# EAGLE board tdoa_4011 (EAGLE 8.2.2)
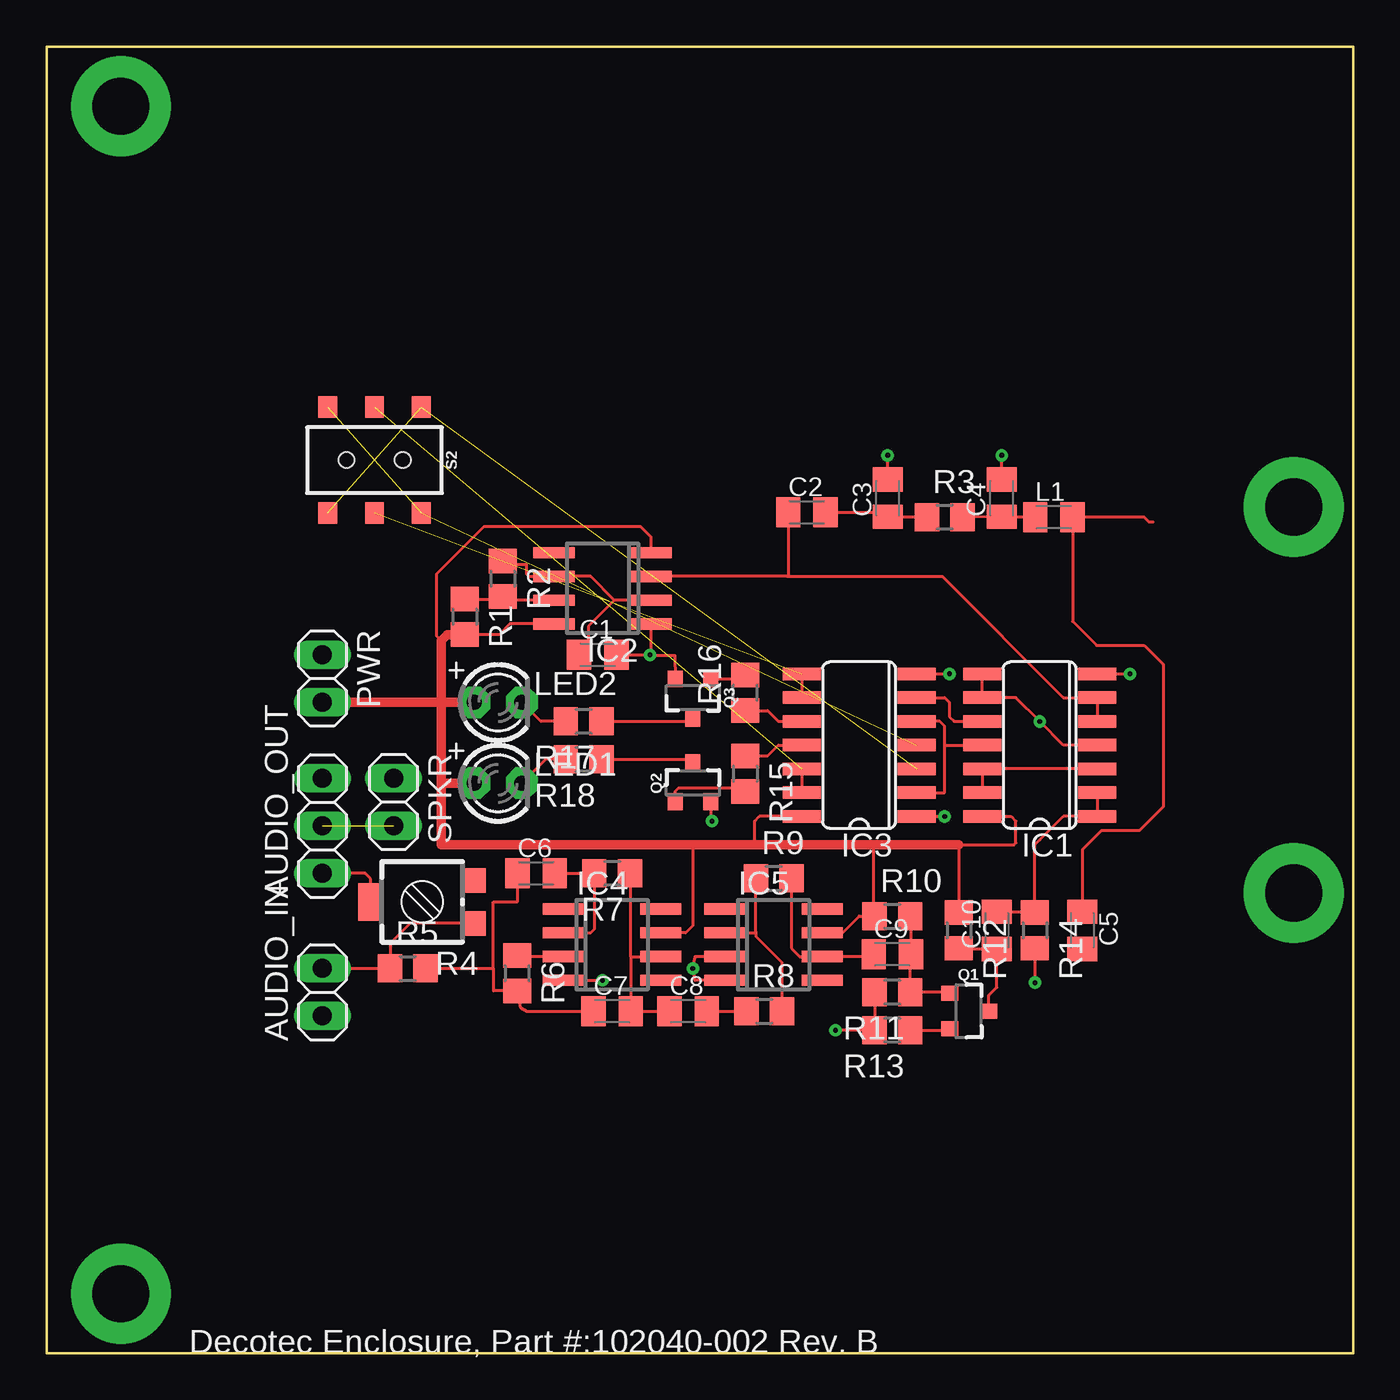
[diagram p0: board, top side]
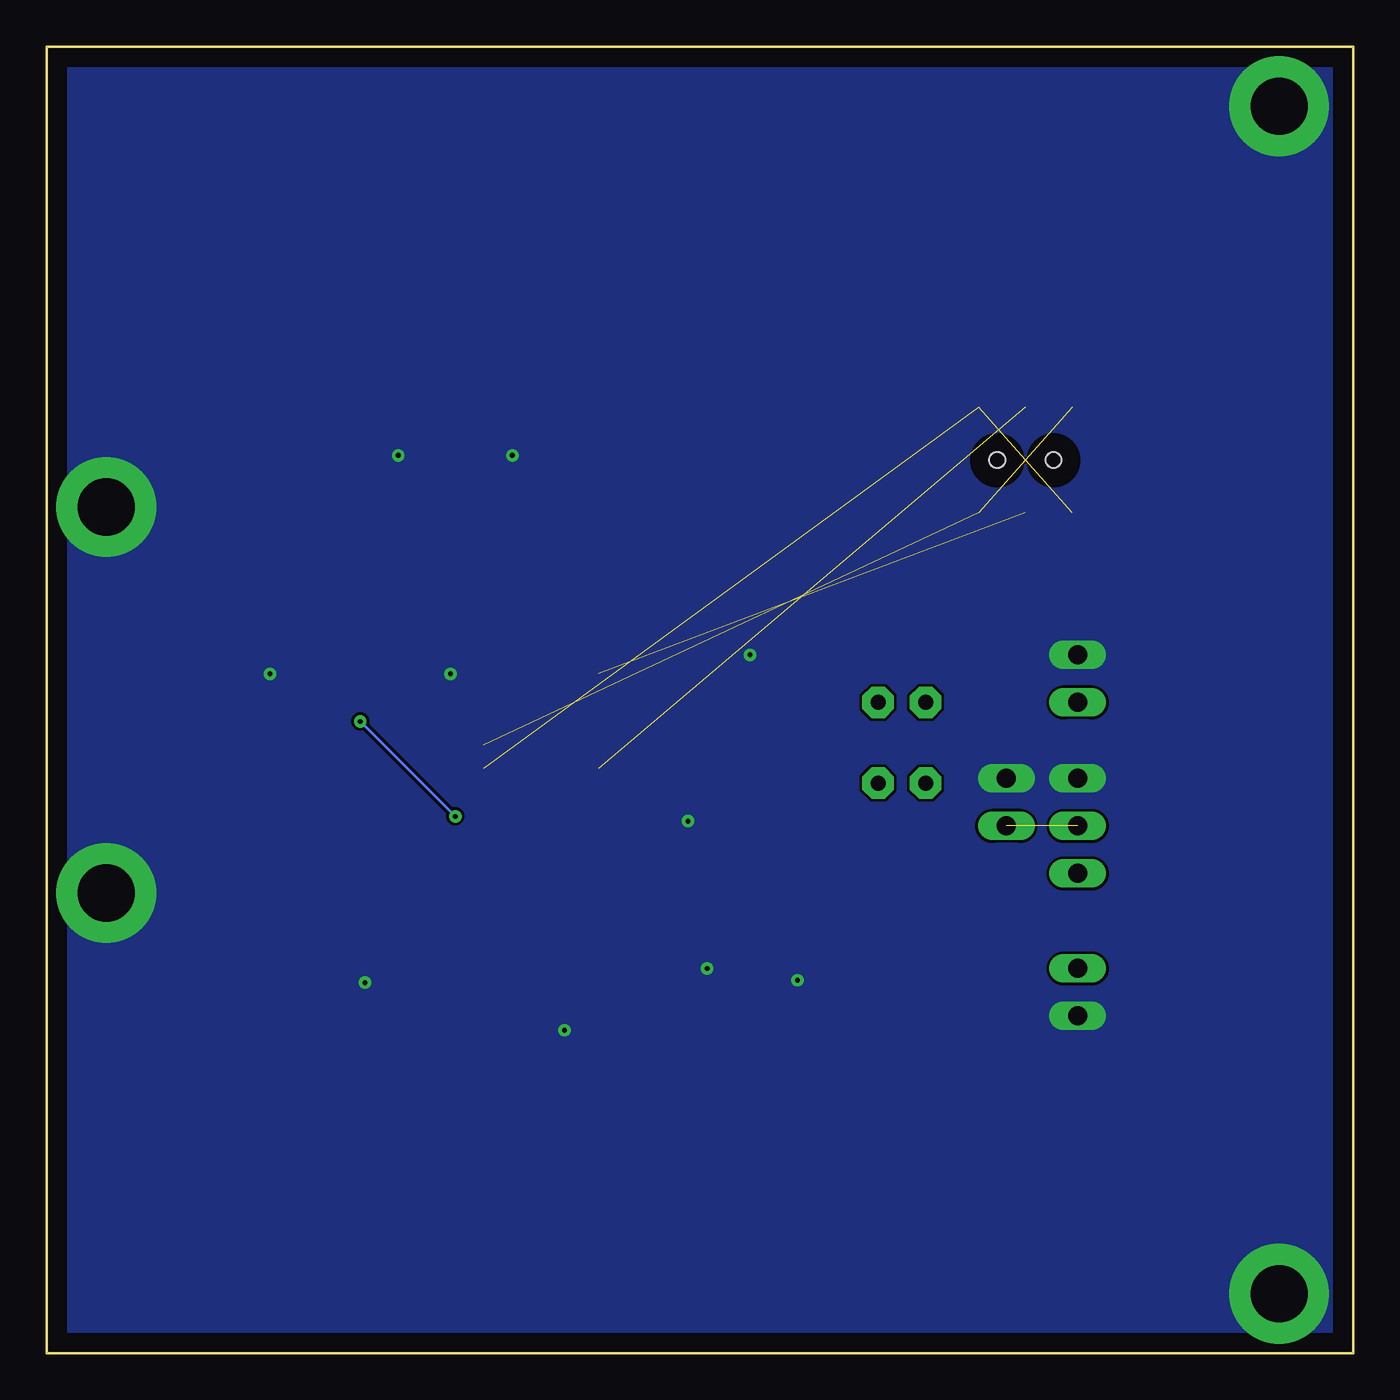
[diagram p1: board, bottom side, seen from below]

Size 69.85 x 69.85 mm. Coordinates in mm from the lower left corner, seen from the top.
Copper layers (1*16): Top 0.035mm / dielectric 1.5mm / Bottom 0.035mm
Design rules "default *": minimum track width 6mil, minimum drill 10mil, track to track 6mil, track to pad 6mil, pad to pad 6mil, via to via 6mil, smd to smd 6mil, copper to edge 40mil, drill to drill 6mil, minimum pad ring 10mil, minimum via ring 8mil, stop-mask expansion 4mil, vias tented up to drill 0mil, thermal gap 10mil

## Footprints (pad centres in the part's own frame; a part is rotated, then mirrored left to right if it is on the bottom)
1X02 = drill 1.016 long: 1 -1.27,0; 2 1.27,0
1X03 = drill 1.016 long: 1 -2.54,0; 2 0,0; 3 2.54,0
C0805K = smd 1.3 x 1.6: 1 -1,0; 2 1,0
SO14 = smd 0.66 x 2.032: 1 -3.81,-3.073; 2 -2.54,-3.073; 3 -1.27,-3.073; 4 0,-3.073; 5 1.27,-3.073; 6 2.54,-3.073; 7 3.81,-3.073; 8 3.81,3.073; 9 2.54,3.073; 10 1.27,3.073; 11 0,3.073; 12 -1.27,3.073; 13 -2.54,3.073; 14 -3.81,3.073
SO08 = smd 0.6 x 2.2: 1 -1.905,-2.6; 2 -0.635,-2.6; 3 0.635,-2.6; 4 1.905,-2.6; 5 1.905,2.6; 6 0.635,2.6; 7 -0.635,2.6; 8 -1.905,2.6
LED3MM = drill 0.813 pad 1.676 octagon: A -1.27,0; K 1.27,0
SOT23-3 = smd 0.8 x 0.9: 1 -0.95,-1; 2 0.95,-1; 3 0,1.1
R0805 = smd 1.3 x 1.5: 1 -0.95,0; 2 0.95,0
RTRIM3314G = smd 1.3 x 1.3: 1 1.15,-2.75; 3 -1.15,-2.75 | smd 2 x 1.3: 2 0,2.75
SWITCH_DPDT_SMD_AYZ0202 = smd 1 x 1.15: 1 -2.5,2.825; 2 0,2.825; 3 2.5,2.825; 4 -2.5,-2.825; 5 0,-2.825; 6 2.5,-2.825 | hole 0.85: 1.5,0; -1.5,0
DECOTEC_102040-002B = drill 3.048 pad 5.334: P$1 3.969,3.175; P$2 3.969,66.675; P$3 66.675,45.244; P$4 66.675,24.606

## Placement (x,y rotation side)
AUDIO_IN  [1X02]  14.73,19.3 90 top
AUDIO_OUT  [1X03]  14.73,28.19 90 top
C1  0.0022uF  [C0805K]  29.46,37.34 0 top
C2  [C0805K]  40.64,44.96 0 top
C3  [C0805K]  44.96,45.72 90 top
C4  [C0805K]  51.05,45.72 90 top
C5  [C0805K]  55.37,22.61 270 top
C6  0.01uF  [C0805K]  26.16,25.65 0 top
C7  0.01uF  [C0805K]  30.23,18.29 0 top
C8  10uF  [C0805K]  34.29,18.29 0 top
C9  0.001uF  [C0805K]  45.21,21.34 0 top
C10  0.047uF  [C0805K]  50.8,22.61 90 top
IC1  4011D  [SO14]  53.09,32.51 90 top
IC2  NE555D  [SO08]  29.72,40.89 90 top
IC3  4011D  [SO14]  43.43,32.51 90 top
IC4  LM741D  [SO08]  30.23,21.84 270 top
IC5  LM741D  [SO08]  38.86,21.84 270 top
L1  L-US0805K  [C0805K]  53.85,44.7 0 top
LED1  [LED3MM]  24.13,30.48 0 top
LED2  [LED3MM]  24.13,34.8 0 top
PWR  [1X02]  14.73,36.07 270 top
Q1  600mA/40V  [SOT23-3]  49.28,18.29 270 top
Q2  600mA/40V  [SOT23-3]  34.54,30.48 0 top
Q3  600mA/40V  [SOT23-3]  34.54,35.05 180 top
R1  1k  [R0805]  22.35,39.37 270 top
R2  330k  [R0805]  24.38,41.4 270 top
R3  1k  [R0805]  48.01,44.7 0 top
R4  500k  [RTRIM3314G]  20.07,24.13 90 top
R5  33k  [R0805]  19.3,20.57 0 top
R6  1k  [R0805]  25.15,20.32 270 top
R7  330k  [R0805]  30.23,25.65 180 top
R8  1k  [R0805]  38.35,18.29 0 top
R9  10k  [R0805]  38.86,25.4 0 top
R10  82k  [R0805]  45.21,23.37 0 top
R11  100k  [R0805]  45.21,19.3 180 top
R12  8.2k  [R0805]  48.77,22.61 270 top
R13  390  [R0805]  45.21,17.27 180 top
R14  1M  [R0805]  52.83,22.61 270 top
R15  100k  [R0805]  37.34,30.99 270 top
R16  100k  [R0805]  37.34,35.31 90 top
R17  560  [R0805]  28.7,33.78 180 top
R18  560  [R0805]  28.7,31.75 180 top
S2  [SWITCH_DPDT_SMD_AYZ0202]  17.53,47.75 180 top
SPKR  [1X02]  18.54,29.46 270 top
U$1  DECOTEC_102040-002B  [DECOTEC_102040-002B]  0,0 0 top

## Library data of the parts
AUDIO_IN AUDIO_OUT PWR SPKR = pinhead
C1-C10 R1-R18 = rcl
IC1 IC3 = 40xx
IC2 IC4 IC5 = linear
L1 = kj4qlp
LED1 LED2 = adafruit
Q1-Q3 = SparkFun-DiscreteSemi; PROD_ID: TRANS-08049
S2 = SparkFun-Switches; PROD_ID: SWCH-08179; SF_SKU: COM-00597
U$1 = vtgs

## Nets
GND: AUDIO_IN.1 AUDIO_OUT.3 C1.2 C3.2 C4.2 IC1.7 IC2.1 IC3.7 IC4.4 IC5.3 IC5.4 PWR.1 Q2.2 Q3.2 R11.2 R13.2 R14.2 SPKR.1 U$1.P$1 U$1.P$2 U$1.P$3 U$1.P$4
IN_FILT: C10.2 IC1.1 IC1.2 R14.1
IN_GEN: C2.1 IC1.5 IC1.6 IC2.3
N$1: IC1.4 IC1.8 IC1.9 IC3.1
N$2: IC2.7 R1.1 R2.2
N$3: C1.1 IC2.2 IC2.6 R2.1
N$4: C2.2 C3.1 R3.1
N$5: C4.1 L1.1 R3.2
N$6: AUDIO_OUT.1 R4.2
N$7: C5.2
N$8: C5.1 L1.2
N$9: AUDIO_IN.2 R4.3 R5.1
N$10: C6.1 C7.1 R5.2 R6.2
N$11: IC4.3 R6.1
N$12: C6.2 IC4.2 R7.2
N$13: C7.2 C8.1 IC4.6 R7.1
N$14: C8.2 R8.1
N$15: IC5.2 R8.2 R9.1
N$16: C9.1 IC5.6 R9.2
N$17: C9.2 Q1.1 R10.2 R11.1
N$18: Q1.2 R13.1
N$19: C10.1 Q1.3 R12.2
N$20: IC1.3 IC1.12 IC1.13
N$21: IC1.11 IC3.2 IC3.5
N$22: IC3.4 S2.1 S2.6
N$23: IC1.10 IC3.6
N$24: IC3.3 S2.3 S2.4
N$25: IC3.12 IC3.13 S2.5
N$26: IC3.8 IC3.9 S2.2
N$27: Q2.3 R18.1
N$28: LED1.K R18.2
N$29: Q3.3 R17.1
N$30: LED2.K R17.2
N$31: IC3.11 R15.1
N$32: Q2.1 R15.2
N$33: IC3.10 R16.1
N$34: Q3.1 R16.2
SPKR+: AUDIO_OUT.2 SPKR.2
VCC: IC1.14 IC2.4 IC2.8 IC3.14 IC4.7 IC5.7 LED1.A LED2.A PWR.2 R1.2 R10.1 R12.1

## Tracks (layer width: path | path; a pad name or v marks a point on that pad's centre or on a via)
GND  (via drill 0.25)
  Top 0.152: IC5.3 34.67,21.21 v34.54,20.57 34.67,19.94 IC5.4 | IC4.4 v29.72,19.94 | R11.2 R13.2 v42.16,17.27 | R14.2 v52.83,19.81 | 32.32,37.32 IC2.1 | 32.32,37.32 33.59,37.32 Q3.2 | Q2.2 35.49,28.51 v35.56,28.45 | C3.2 v44.96,48.01 | C4.2 v51.05,48.01 | IC3.7 v48.26,36.32 | IC1.7 v57.91,36.32 | 32.32,37.32 32.3,37.34 v32.26,37.34 C1.2
  pour Bottom (no thermals): 0,69.85 69.85,69.85 69.85,0 0,0
IN_FILT
  Top 0.152: C10.2 52.78,23.61 R14.1 52.83,27.18 53.09,27.44 54.36,28.7 IC1.1 IC1.2
IN_GEN
  Top 0.152: 56.16,34.91 IC1.5 | 56.16,34.91 IC1.6 | 56.16,34.91 56.02,35.05 54.36,35.05 47.88,41.53 39.59,41.53 | 39.59,41.53 IC2.3 | C2.1 39.64,41.58 39.59,41.53
N$1  (via drill 0.25)
  Top 0.152: 50.01,35.11 IC1.9 | 50.01,35.11 IC1.8 | IC1.4 54.36,32.51 v53.09,33.78 51.82,35.05 50.07,35.05 50.01,35.11 | IC3.1 v48.01,28.7
  Bottom 0.152: v48.01,28.7 v53.09,33.78
N$2
  Top 0.152: R1.1 24.25,40.32 R2.2 24.58,40.26 IC2.7
N$3
  Top 0.152: R2.1 24.57,42.16 25.65,42.16 25.65,41.66 25.78,41.53 IC2.6 29.08,41.53 30.35,40.26 | IC2.2 30.35,40.26 | 30.35,40.26 28.96,38.86 28.96,37.83 C1.1
N$4
  Top 0.152: R3.1 44.97,44.7 C3.1 44.69,44.96 C2.2
N$5
  Top 0.152: L1.1 51.07,44.7 C4.1 48.97,44.69 R3.2
N$6
  Top 0.152: R4.2 17.32,25.36 17.02,25.65 AUDIO_OUT.1
N$7
  Top 0.152: 55.39,21.59 C5.2
N$8
  Top 0.152: 59.16,44.45 58.93,44.45 58.67,44.7 L1.2 54.85,39.13 56.13,37.85 58.67,37.85 59.69,36.83 59.69,29.21 58.42,27.94 56.39,27.94 55.37,26.92 C5.1
N$9
  Top 0.152: AUDIO_IN.2 R5.1 18.35,21.91 19.42,22.98 R4.3
N$10
  Top 0.152: C6.1 25.15,25.65 25.15,24.13 23.88,24.13 23.88,20.58 23.88,20.57 | C7.1 25.65,18.29 25.33,18.48 R6.2 23.88,19.37 23.88,20.57 | R5.2 23.88,20.57
N$11
  Top 0.152: IC4.3 25.15,21.21 R6.1
N$12
  Top 0.152: IC4.2 29.08,22.48 29.28,22.67 R7.2 C6.2
N$13
  Top 0.152: R7.1 31.23,25.65 31.23,21.21 | 31.23,21.21 C7.2 C8.1 | 31.23,21.21 IC4.6
N$14
  Top 0.152: C8.2 R8.1
N$15
  Top 0.152: R8.2 39.3,20.89 37.91,22.29 37.91,22.51 | 37.91,22.51 R9.1 | IC5.2 37.88,22.48 37.91,22.51
N$16
  Top 0.152: C9.1 43.83,21.21 IC5.6 40.26,21.21 39.81,21.66 R9.2
N$17
  Top 0.152: Q1.1 48.21,19.3 R11.1 46.16,21.29 C9.2 46.21,23.32 R10.2
N$18
  Top 0.152: R13.1 48.21,17.27 Q1.2
N$19
  Top 0.152: Q1.3 50.38,19.13 50.8,19.56 C10.1 48.82,21.61 R12.2
N$20
  Top 0.152: IC1.3 IC1.12 IC1.13
N$21
  Top 0.152: 48.01,32.51 IC1.11 | 48.01,32.51 48.01,33.53 47.75,33.78 IC3.5 | IC3.2 48.01,29.97 48.01,32.51
N$22  (2 unrouted)
N$23
  Top 0.152: IC3.6 48.01,35.05 48.26,34.8 48.26,34.04 48.51,33.78 IC1.10
N$24  (2 unrouted)
N$25  (1 unrouted)
  Top 0.152: IC3.12 IC3.13
N$26  (1 unrouted)
  Top 0.152: IC3.8 IC3.9
N$27
  Top 0.152: R18.1 34.37,31.75 Q2.3
N$28
  Top 0.152: R18.2 26.67,31.75 LED1.K
N$29
  Top 0.152: R17.1 34.37,33.78 Q3.3
N$30
  Top 0.152: R17.2 26.42,33.78 LED2.K
N$31
  Top 0.152: IC3.11 39.12,32.51 38.54,31.94 R15.1
N$32
  Top 0.152: Q2.1 33.59,30.04 33.78,30.23 37.15,30.23 R15.2
N$33
  Top 0.152: IC3.10 39.12,33.78 38.54,34.36 R16.1
N$34
  Top 0.152: Q3.1 37.13,36.05 R16.2
SPKR+  (1 unrouted)
VCC
  Top 0.152: IC4.7 34.16,22.48 34.54,22.86 34.54,27.18 | IC3.14 38.1,28.7 37.85,28.45 37.85,27.18 | 44.2,27.18 44.2,23.43 R10.1 43.43,23.37 42.55,22.48 IC5.7 | R12.1 48.77,27.18 51.7,27.18 51.82,27.29 51.82,28.45 51.56,28.7 IC1.14 | R1.2 24.2,38.42 24.77,38.99 IC2.8 | IC2.4 32.32,43.63 31.75,44.2 23.37,44.2 20.83,41.66 20.83,38.35 21.08,38.1
  Top 0.508: 21.06,34.8 PWR.2 | 21.06,34.8 LED2.A | 48.77,27.18 44.2,27.18 37.85,27.18 34.54,27.18 21.08,27.18 21.08,30.55 | 21.08,34.78 21.08,30.55 | 21.08,34.78 21.06,34.8 | LED1.A 21.15,30.48 21.08,30.55 | R1.2 21.4,38.42 21.08,38.1 21.08,34.78